# Altium PCB ADC_Sensor_Unit_board.PcbDoc
Units mm, origin at the board's own origin, x right, y up, seen from the top; angles counter-clockwise.
Board outline 60 x 60 mm, 4 copper layers (Component Side Top, Ground Plane, Power Plane, Component Side Bottom), stack 0.844 mm thick; 87 components, 63 nets, 347 pads, 119 vias.
Unrouted connection lines stored in the file: 6.
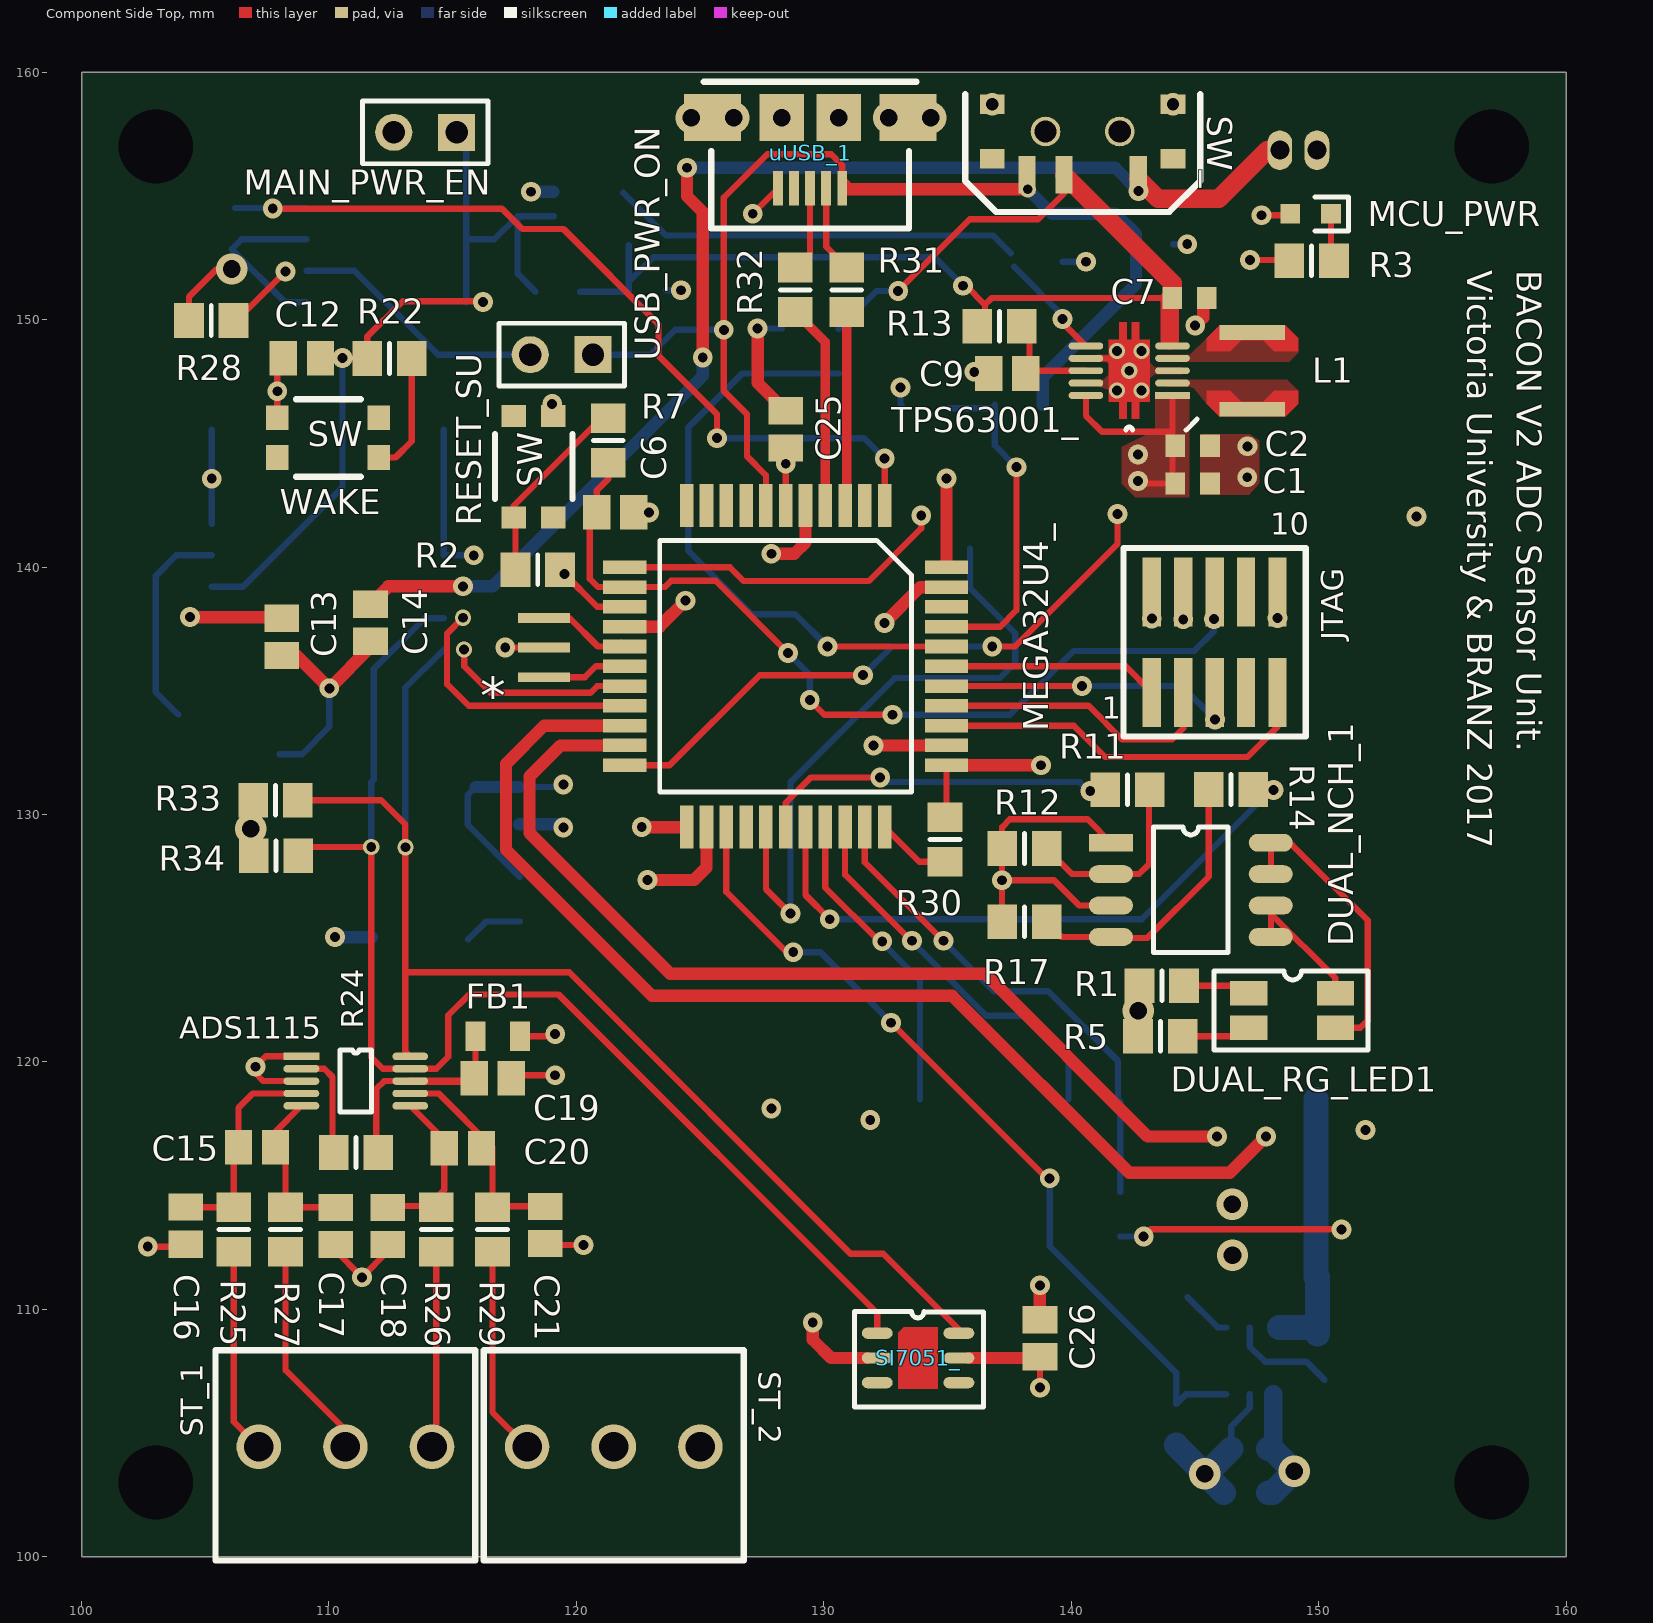
[diagram p0: Component Side Top view]
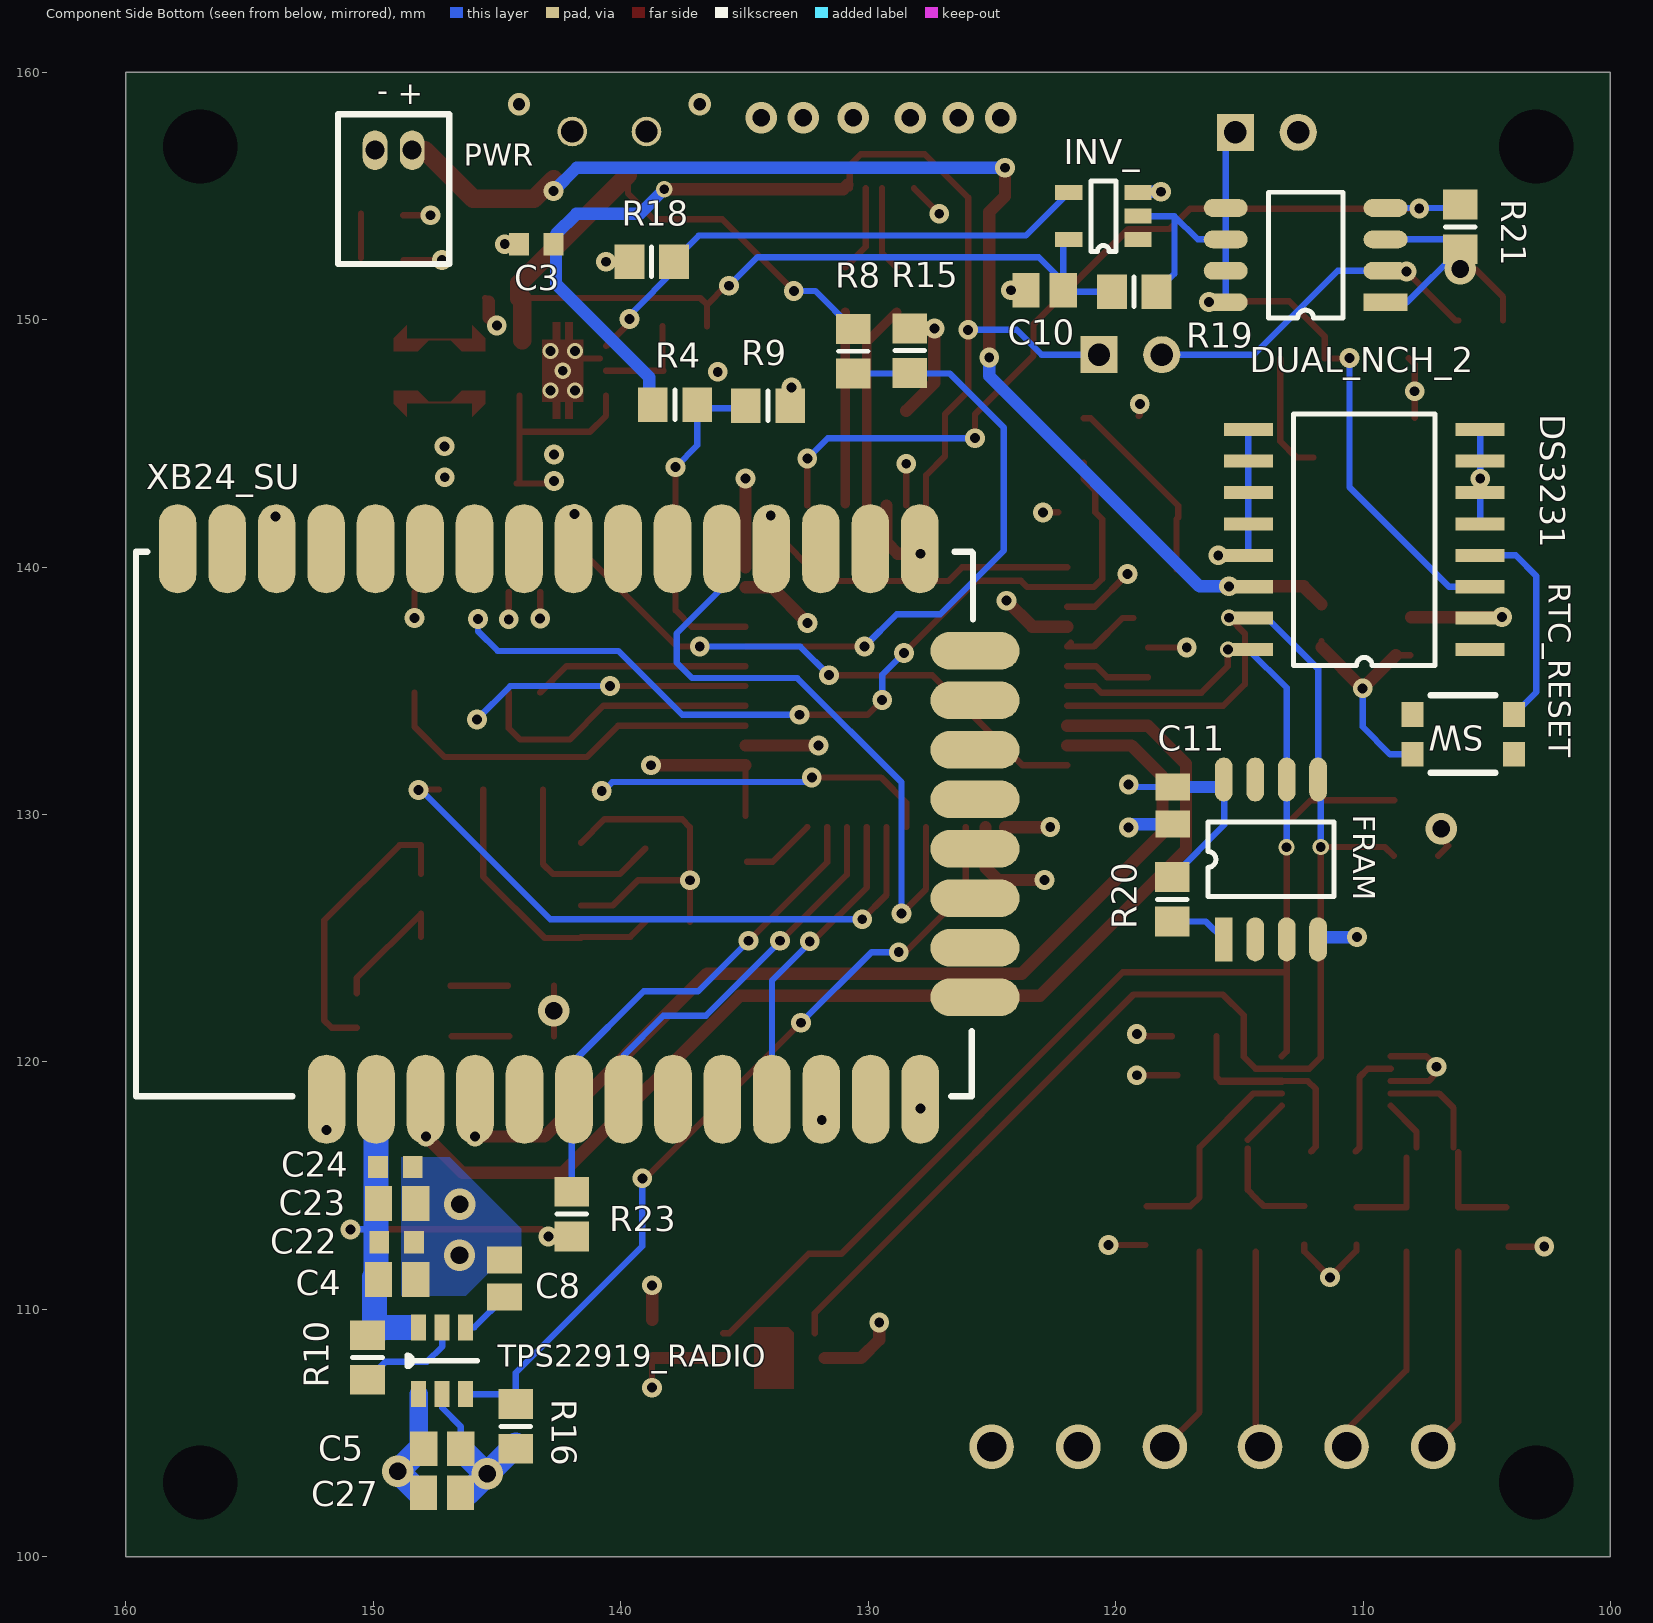
[diagram p1: Component Side Bottom view, seen from below]
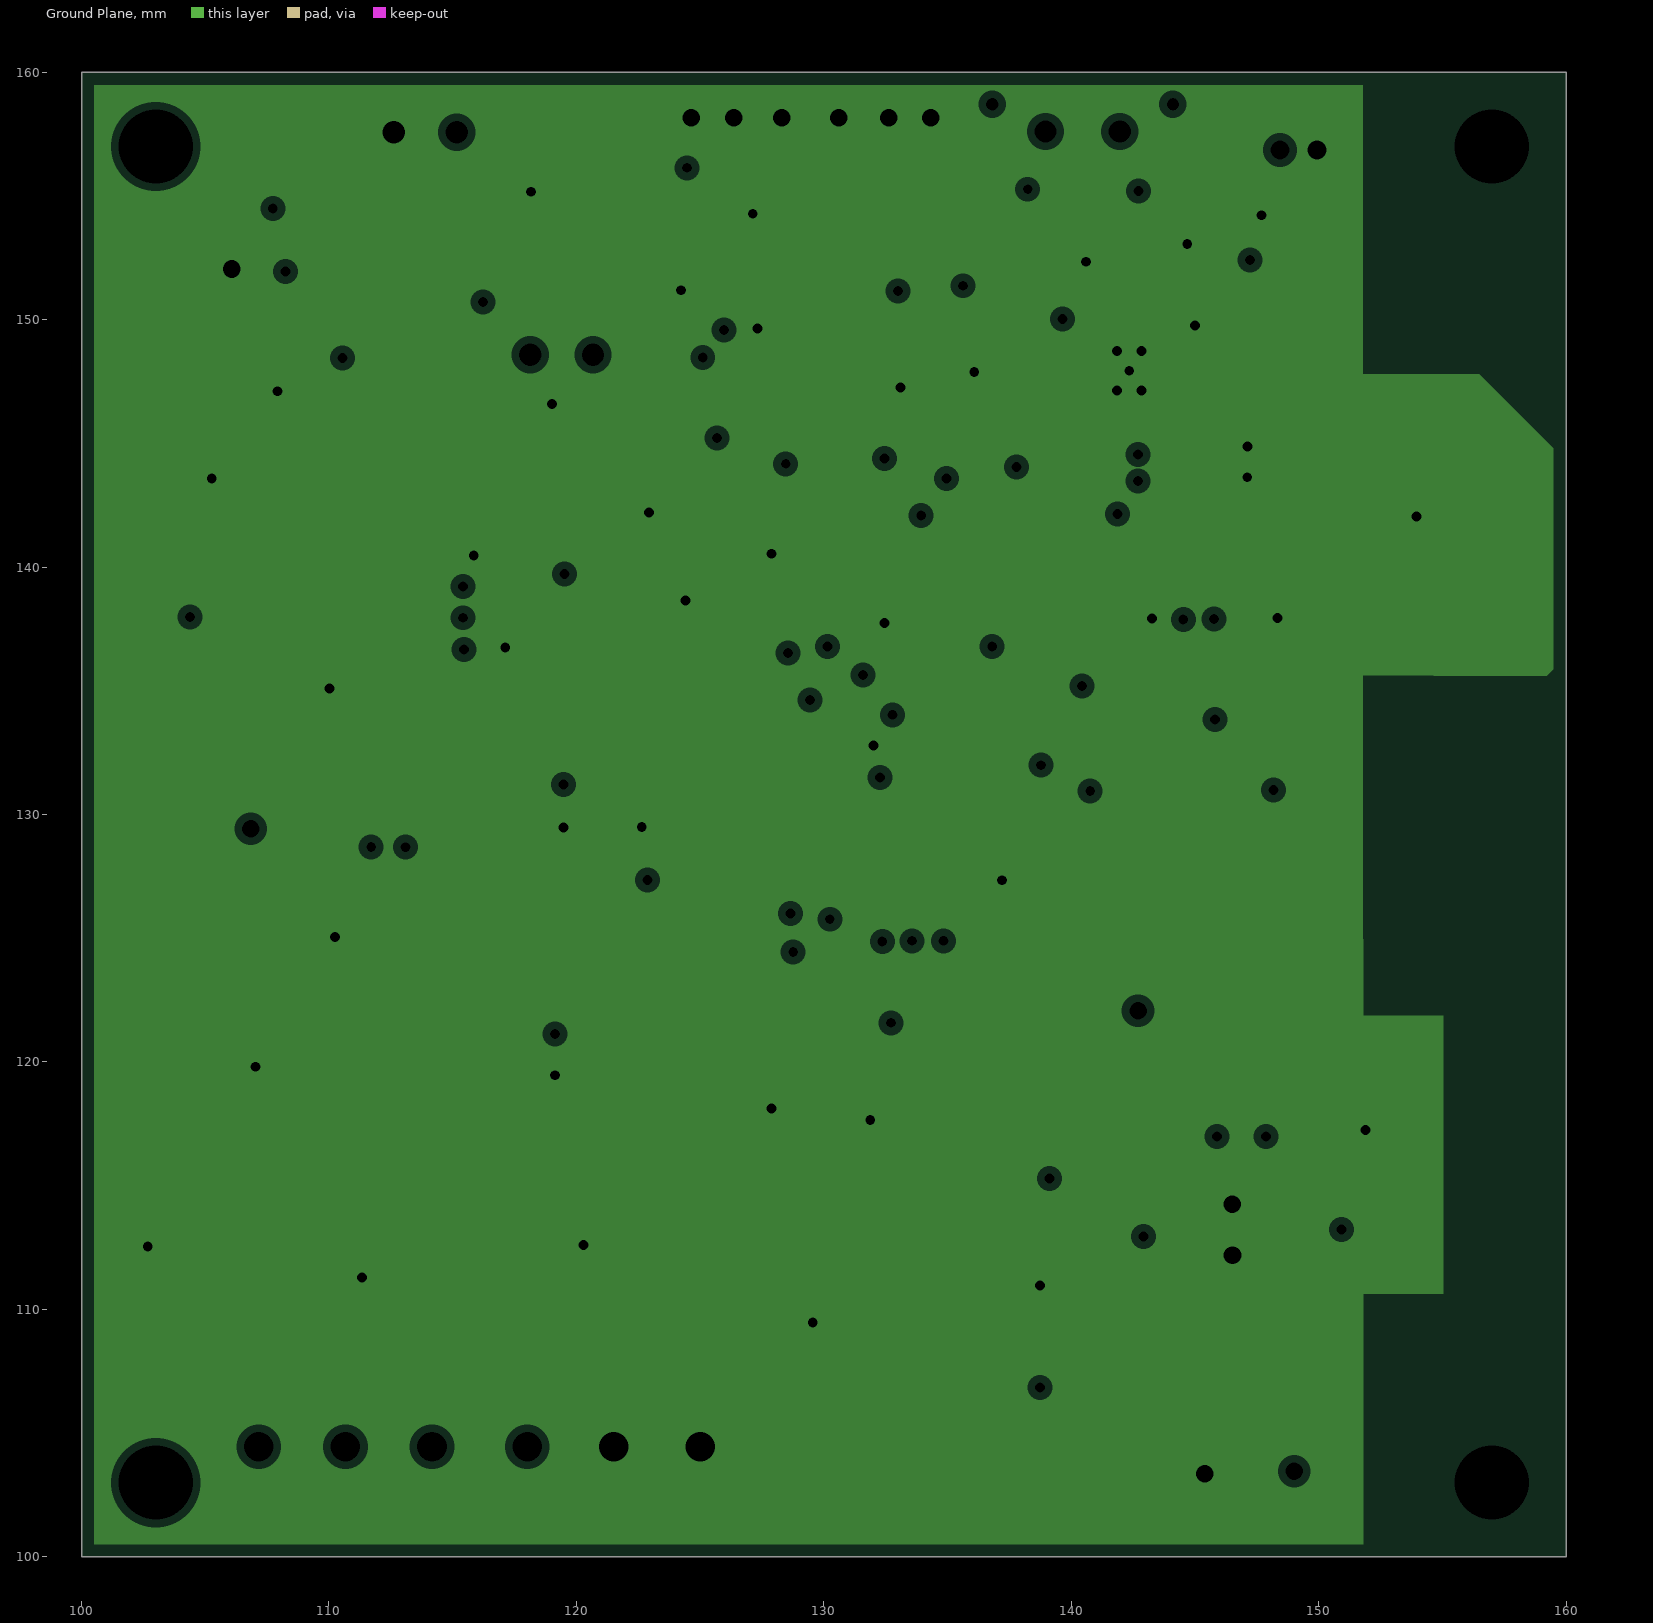
[diagram p2: Ground Plane, clearances drawn from the general rule]
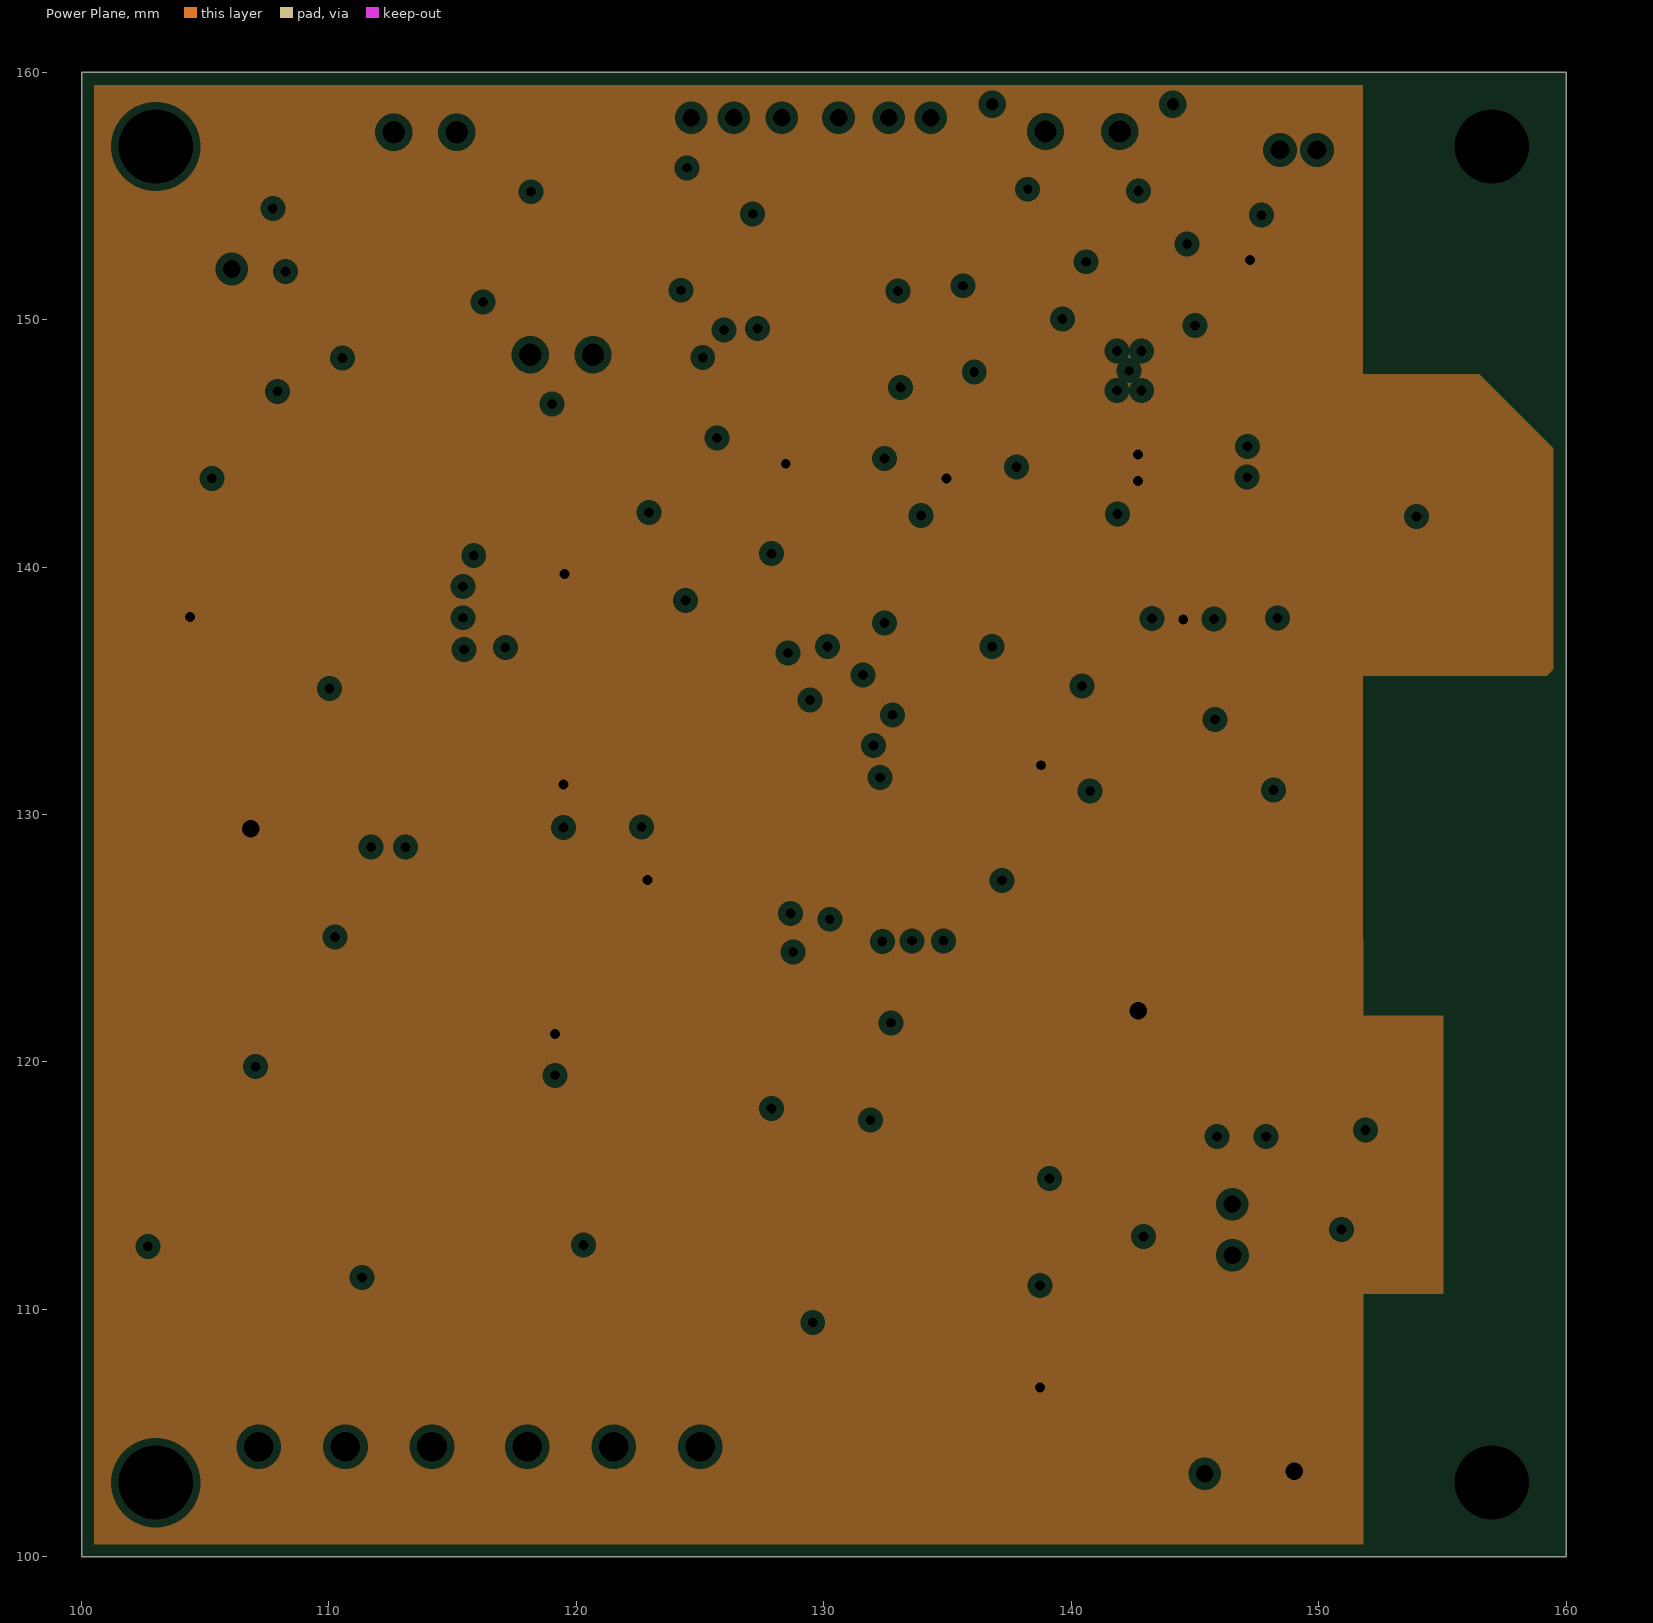
[diagram p3: Power Plane, clearances drawn from the general rule]

## Layer stack, top to bottom
Top Solder: solder mask 0.0102, Solder Resist, Dk 3.5
Component Side Top: signal copper 0.0356
Dielectric 1: core 0.32, FR-4, Dk 4.8
Ground Plane: plane copper 0.036, net GND
Dielectric 3: prepreg 0.127, Dk 4.2
Power Plane: plane copper 0.036, net +3V3
Dielectric 4: core 0.254, Dk 4.2
Component Side Bottom: signal copper 0.0356
Bottom Solder: solder mask 0.0102, Solder Resist, Dk 3.5

## Board outline
100,100 160,100 160,160 100,160

## Design rules (kind name [scope] priority, off if disabled: settings)
Clearance [All] p1: gap=0.152
DiffPairsRouting [All] p1: maxlimit=0.254 minlimit=0.254 mostfreqgap=0.254 toplayer_minwidth=0.381 toplayer_maxwidth=0.381 toplayer_prefwidth=0.381 bottomlayer_minwidth=0.381 bottomlayer_maxwidth=0.381 bottomlayer_prefwidth=0.381 maxuncoupledlength=12.7
HoleSize [All] p1: absolutevalues=TRUE maxlimit=6.3 minlimit=0.3 maxpercent=80.000 minpercent=20.000
PlaneClearance [All] p1: clearance=0.305
PlaneConnect [All] p1: planeconnectstyle=Direct reliefexpansion=0.508 reliefentries=4 reliefconductorwidth=0.254 reliefairgap=0.254
PolygonConnect PolygonConnect_5 [All vs IsNamedPolygon('RegGND')] p1: connectstyle=Direct reliefconductorwidth=0.254 reliefentries=4 polygonreliefangle="90 Angle" airgapwidth=0.254
PolygonConnect PolygonConnect_4 [All vs IsNamedPolygon('RegGND')] p2: connectstyle=Direct reliefconductorwidth=0.254 reliefentries=4 polygonreliefangle="90 Angle" airgapwidth=0.254
PolygonConnect PolygonConnect_3 [All vs IsNamedPolygon('GND')] p3: connectstyle=Direct reliefconductorwidth=0.254 reliefentries=4 polygonreliefangle="90 Angle" airgapwidth=0.254
PolygonConnect PolygonConnect_2 [All vs IsNamedPolygon('L1_pin_2')] p4: connectstyle=Direct reliefconductorwidth=0.254 reliefentries=4 polygonreliefangle="90 Angle" airgapwidth=0.254
PolygonConnect PolygonConnect_1 [All vs IsNamedPolygon('L1_pin')] p5: connectstyle=Direct reliefconductorwidth=0.254 reliefentries=4 polygonreliefangle="90 Angle" airgapwidth=0.254
PolygonConnect [All] p6: connectstyle=Direct reliefconductorwidth=0.254 reliefentries=4 polygonreliefangle="90 Angle" airgapwidth=0.254
RoutingVias [All] p1: holewidth=0.4 width=0.8 viastyle="Through Hole" minholewidth=0.3 minwidth=0.6 maxholewidth=6.3 maxwidth=2
SolderMaskExpansion [All] p1: expansion=0.102
Width [All] p1: maxlimit=10 minlimit=0.152 preferedwidth=0.254
26 further rules are at their usual default settings.

## Classes and differential pairs
differential pair D_SU2: +D_SU2_P -D_SU2_N

## Components (designator, comment, footprint, x,y, rotation, side; value= is the part's Value field where it differs from the comment)
* "Resonator_8MHz" Resonator_8MHz 118.695,135.549 r90 top (schematic designator *1)
ADS1115 "ADS1115" VSSOP10 108.887,120.228 r0 top (schematic designator ADC_)
C1 "Cap Semi" 1608[0603] 144.907,143.383 r0 top
C2 "Cap Semi" 1608[0603] 144.907,144.907 r0 top
C3 "Cap Semi" 1608[0603] 143.414,153.054 r180 bottom
C4 "Cap Semi" C0805 149.041,111.21 r180 bottom
C5 "Cap Semi" C0805 147.214,104.369 r180 bottom
C6 "Cap Semi" C0805 121.574,142.213 r180 top
C7 "Cap Semi" 1608[0603] 144.78,150.876 r180 top
C8 "Cap Semi" C0805 144.7,111.249 r90 bottom
C9 "Cap Semi" C0805 137.414,147.828 r0 top
C10 "Cap Semi" C0805 122.871,151.191 r180 bottom
C11 "Cap Semi" C0805 117.698,130.365 r90 bottom
C12 "Cap Semi" C0805 108.908,148.447 r180 top
C13 "Cap Semi" C0805 108.098,137.184 r90 top
C14 "Cap Semi" C0805 111.68,137.751 r90 top
C15 "Cap Semi" C0805 107.091,116.549 r180 top
C16 "Cap Semi" C0805 104.217,113.385 r270 top
C17 "Cap Semi" C0805 110.269,113.37 r270 top
C18 "Cap Semi" C0805 112.38,113.37 r270 top
C19 "Cap Semi" C0805 116.622,119.34 r0 top
C20 "Cap Semi" C0805 115.413,116.507 r180 top
C21 "Cap Semi" C0805 118.743,113.415 r270 top
C22 "Cap Semi" 1608[0603] 149.063,112.711 r180 bottom
C23 "Cap Semi" C0805 149.041,114.279 r180 bottom
C24 "Cap Semi" 1608[0603] 149.107,115.759 r180 bottom
C25 "Cap Semi" C0805 128.459,145.571 r270 top
C26 "Cap Semi" C0805 138.736,108.836 r270 top
C27 "Cap Semi" C0805 147.225,102.595 r180 bottom
DS3231 "DS3231" "16 SO" 105.265,136.667 r0 bottom
DUAL_NCH_1 "DUAL_MOSFET_IRF8915TRPBF" SOP-8 141.605,128.864 r0 top
DUAL_NCH_2 "DUAL_MOSFET_IRF8915TRPBF" SOP-8 109.092,150.707 r0 bottom
DUAL_RG_LED1 "LED_GREEN_RED_HSMF" LED4 147.176,122.78 r0 top
FB1 "Ferrite_Bead" FERRITE_BEAD 115.92,121.039 r0 top
FRAM "FRAM 8-SOP" SOP-8 115.628,124.957 r90 bottom
INV_ "Inverter" SOT-23 119.098,153.237 r0 bottom
JTAG "FTSH-105-01-XXX-DV-K" FTSH-105-01-XXX-DV-K 145.799,136.965 r0 top
L1 "Inductor" 2.2uH_Inductor 147.32,149.479 r270 top
MAIN_PWR_EN "Header 2" HDR1X2 115.161,157.574 r180 top
MCU_PWR "LED2" LED_Single_Orange 150.503,154.279 r180 top
MEGA32U4_ "ATMEGA32U4-AUR" Quad44 132.461,142.494 r270 top
PWR "ZH Conn" "ZH Series Header - 2 Position" 149.182,156.854 r0 bottom
R1 "Res3" 6-0805_N 143.662,123.076 r180 top
R2 "Res3" 6-0805_N 118.439,139.902 r0 top
R3 "Res3" 6-0805_N 149.718,152.377 r0 top
R4 "Res3" 6-0805_N 137.807,146.56 r0 bottom
R5 "Res3" 6-0805_N 143.603,121.038 r180 top
R7 "Res3" 6-0805_N 121.29,145.119 r90 top
R8 "Res3" 6-0805_N 130.6,148.725 r90 bottom
R9 "Res3" 6-0805_N 134.055,146.519 r0 bottom
R10 "Res3" 6-0805_N 150.238,108.053 r90 bottom
R11 "Res3" 6-0805_N 142.272,131.003 r180 top
R12 "Res3" 6-0805_N 138.107,128.629 r0 top
R13 "Res3" 6-0805_N 137.099,149.737 r180 top
R14 "Res3" 6-0805_N 146.456,131.015 r0 top
R15 "Res3" 6-0805_N 128.315,148.747 r270 bottom
R16 "Res3" 6-0805_N 144.241,105.275 r270 bottom
R17 "Res3" 6-0805_N 138.107,125.666 r0 top
R18 "Res3" 6-0805_N 138.751,152.343 r180 bottom
R19 "Res3" 6-0805_N 119.25,151.131 r180 bottom
R20 "Res3" 6-0805_N 117.717,126.576 r90 bottom
R21 "Res3" 6-0805_N 106.077,153.754 r90 bottom
R22 "Res3" 6-0805_N 112.45,148.435 r180 top
R23 "Res3" 6-0805_N 141.984,113.85 r90 bottom
R24 "Res3" 6-0805_N 111.091,116.345 r180 top
R25 "Res3" 6-0805_N 106.15,113.23 r90 top
R26 "Res3" 6-0805_N 114.334,113.23 r90 top
R27 "Res3" 6-0805_N 108.247,113.23 r90 top
R28 "Res3" 6-0805_N 105.244,149.971 r180 top
R29 "Res3" 6-0805_N 116.609,113.23 r90 top
R30 "Res3" 6-0805_N 134.901,128.992 r270 top
R31 "Res3" 6-0805_N 130.931,151.21 r270 top
R32 "Res3" 6-0805_N 128.85,151.21 r270 top
R33 "Res3" 6-0805_N 107.837,130.581 r0 top
R34 "Res3" 6-0805_N 107.862,128.336 r0 top
RESET_SU "SW-PB" SW_TACTILE 117.466,142.01 r90 top
RTC_RESET "SW-PB" SW_TACTILE 103.901,132.442 r0 bottom (schematic designator RTC_RESET_1)
SI7051_ "SI7051" "SI7051 - small" 132.26,109.039 r0 top
ST_1 "Screw_terminal" "Screw Terminal" 110.665,104.45 r0 top
ST_2 "Screw_terminal" "Screw Terminal" 121.511,104.45 r0 top
SW_ "Slide_switch" Slide_SW 140.462,157.607 r180 top
TPS22919_RADIO "TPS22918-Q1" SOT-23-6 148.171,106.573 r90 bottom
TPS63001_ "TPS63001DRCT" "SON10 - small" 144.145,146.939 r180 top locked
USB_PWR_ON "Header 2" HDR1X2 120.675,148.588 r180 top (schematic designator P1)
uUSB_1 "micro_USB" MicroUSB_CONN 129.447,155.316 r180 top
WAKE "SW-PB" SW_TACTILE 107.915,146.033 r0 top
XB24_SU "XB24CDMUIS-001" XB24_RADIO 151.892,118.618 r90 bottom locked

## Footprints (in the part's own frame and the unit in brackets; to place one, negate y for a bottom-side part, rotate by r counter-clockwise, add the part's x,y. Pads: shape width x height; smd on the part's side, far side on the other; paste and mask are expansions set on the pad)
2.2uH_Inductor [mm] "LPS3314-222MRB"
  rect 0.6x2.65 smd: 1(0,0) 2(3.1,0)
  Component Side Top region: 3.4,-1.325 2.875,-1.85 2.35,-1.85 2.35,-0.882 2.8,-0.44 2.8,0.44 2.35,0.882 2.35,1.85 2.875,1.85 3.4,1.325 2.85,1.325 2.85,-1.325
  Component Side Top region: -0.3,1.325 0.225,1.85 0.75,1.85 0.75,0.882 0.3,0.44 0.3,-0.44 0.75,-0.882 0.75,-1.85 0.225,-1.85 -0.3,-1.325 0.25,-1.325 0.25,1.325
  body extent -0.3,-1.85 3.4,1.85, height 1.4
6-0805_N [mm] "Chip Resistor, Body 2.0x1.2mm, IPC Medium Density"
  rect 1.2x1.4 smd: 1(-0.9,0) 2(0.9,0)
  silkscreen extent 0,-0.6 0,0.6, body extent -1.07,-0.7 1.07,0.7, height 0.7
"16 SO" [mm]
  rect 1.98x0.53 smd: 1(0,0) 2(0,-1.27) 3(0,-2.54) 4(0,-3.81) 5(0,-5.08) 6(0,-6.35) 7(0,-7.62) 8(0,-8.89) 9(9.37,-8.89) 10(9.37,-7.62) 11(9.37,-6.35) 12(9.37,-5.08) 13(9.37,-3.81) 14(9.37,-2.54) 15(9.37,-1.27) 16(9.37,0)
  silkscreen extent 1.83,-9.53 7.54,0.64, body extent 1.83,-9.53 7.54,0.64, height 3
1608[0603] [mm] "Chip Capacitor, Body 1.6x0.8mm, IPC High Density"
  rect 0.8x0.9 smd: 1(-0.7,0) 2(0.7,0)
  body extent -0.87,-0.48 0.87,0.48, height 1.3
C0805 [mm] "Chip Capacitor, Body 2.0x1.3mm, IPC High Density"
  rect 1.1x1.4 smd: 1(-0.75,0) 2(0.75,0)
  body extent -1.1,-0.72 1.1,0.72, height 1.4
FERRITE_BEAD [mm] "MMZ2012Y152B"
  rect 0.8x1.2 smd: 1(0,0) 2(1.8,0)
  body extent -0.02,-0.58 1.84,0.59, height 2
FTSH-105-01-XXX-DV-K [mil]
  rect 29x110 smd mask+2: 1(-100,-80) 2(-100,80) 3(-50,-80) 4(-50,80) 5(0,-80) 6(0,80) 7(50,-80) 8(50,80) 9(100,-80) 10(100,80)
  silkscreen extent -145,-150 145,150
HDR1X2 [mm] "Connector; Header; 2 Position"
  rect 1.5x1.5 hole 0.9: 1(0,0)
  round 1.5 hole 0.9: 2(2.54,0)
  silkscreen extent -1.27,-1.27 3.81,1.27
LED4 [mm]
  rect 1.5x1 smd: 1(0,0) 2(3.5,0) 3(0,-1.4) 4(3.5,-1.4)
  silkscreen extent -1.4,-2.29 4.83,0.89, body extent -0.03,-1.88 3.62,0.5, height 2
LED_Single_Orange [mm] "KP-1608SECK"
  rect 0.8x0.8 smd: 1(0,0) 2(1.65,0)
  silkscreen extent -0.71,-0.67 0.65,0.7, body extent -0.07,-0.5 1.77,0.46, height 2
MicroUSB_CONN [mm]
  rect 0.4x1.4 smd: 1(-1.3,0) 2(-0.65,0) 3(0,0) 4(0.65,0) 5(1.3,0)
  rect 2.3x1.9 smd: 5(-3.95,-2.85) 5(3.95,-2.85)
  rect 1.8x1.9 smd: 5(-1.15,-2.85) 5(1.15,-2.85)
  silkscreen extent -4.3,-4.3 4.3,1.63
Quad44 [mm]
  rect 1.75x0.55 smd: 1(0,0) 2(0,-0.8) 3(0,-1.6) 4(0,-2.4) 5(0,-3.2) 6(0,-4) 7(0,-4.8) 8(0,-5.6) 9(0,-6.4) 10(0,-7.2) 11(0,-8) 23(13,-8) 24(13,-7.2) 25(13,-6.4) 26(13,-5.6) 27(13,-4.8) 28(13,-4) 29(13,-3.2) 30(13,-2.4) 31(13,-1.6) 32(13,-0.8) 33(13,0)
  rect 0.55x1.75 smd: 12(2.5,-10.5) 13(3.3,-10.5) 14(4.1,-10.5) 15(4.9,-10.5) 16(5.7,-10.5) 17(6.5,-10.5) 18(7.3,-10.5) 19(8.1,-10.5) 20(8.9,-10.5) 21(9.7,-10.5) 22(10.5,-10.5) 34(10.5,2.5) 35(9.7,2.5) 36(8.9,2.5) 37(8.1,2.5) 38(7.3,2.5) 39(6.5,2.5) 40(5.7,2.5) 41(4.9,2.5) 42(4.1,2.5) 43(3.3,2.5) 44(2.5,2.5)
  silkscreen extent 1.41,-9.09 11.59,1.09, body extent 1.27,-9.27 11.68,1.27, height 1.2
Resonator_8MHz [mm] "CSTCE8M00G55Z-R0"
  rect 0.4x2.1 smd: 1(0,0) 2(1.2,0) 3(2.4,0)
  body extent -0.33,-0.95 2.84,0.94, height 1.2
"Screw Terminal" [mm]
  round 1.8 hole 1.2: 1(-3.5,0) 2(0,0) 3(3.5,0)
  silkscreen extent -5.25,-4.6 5.25,3.9, body extent -5.25,-4.6 5.25,3.9, height 10
"SI7051 - small" [mm]
  oval 1.25x0.45 smd: 1(-0.1,0) 2(-0.1,-1) 3(-0.1,-2) 4(3.2,-2) 5(3.2,-1) 6(3.2,0)
  Component Side Top region: 0.98,0.25 2.35,0.25 2.35,-2.25 0.75,-2.25 0.75,0.02
  silkscreen extent -1.02,-2.98 4.2,0.87, body extent -0.33,-2.7 3.44,0.67, height 1
Slide_SW [mm] "PCM12SMTR"
  rect 0.7x1.5 smd: 1(-2.25,1.75) 2(0.75,1.75) 3(2.25,1.75)
  rect 1x0.8 smd: 4(-3.65,-1.1) 4(-3.65,1.1) 4(3.65,-1.1) 4(3.65,1.1)
  round 1.2 hole 0.9: 5(-1.5,0) 5(1.5,0)
  silkscreen extent -4.75,-1.5 4.75,3.25, body extent -3.14,-1.65 3.11,1.58, height 3
"SON10 - small" [mm]
  rect 1.4x0.28 smd: 1(0.05,0)
  oval 1.4x0.28 smd: 2(0.05,-0.5) 3(0.05,-1) 4(0.05,-1.5) 5(0.05,-2) 6(3.55,-2) 7(3.55,-1.5) 8(3.55,-1) 9(3.55,-0.5) 10(3.55,0)
  Component Side Top region: 1.4,0.25 1.4,0.95 1.7,0.95 1.7,0.25 1.9,0.25 1.9,0.95 2.2,0.95 2.2,0.25 2.625,0.25 2.625,-2.25 2.2,-2.25 2.2,-2.95 1.9,-2.95 1.9,-2.25 1.7,-2.25 1.7,-2.95 1.4,-2.95 1.4,-2.25 0.975,-2.25 0.975,0.25
  silkscreen extent -0.94,0.96 1.92,1.4, body extent 0.01,-2.95 3.65,0.96, height 2
SOP-8 [mm]
  rect 1.78x0.72 smd: 1(0,0)
  oval 1.78x0.72 smd: 2(0,-1.27) 3(0,-2.54) 4(0,-3.81) 5(6.46,-3.81) 6(6.46,-2.54) 7(6.46,-1.27) 8(6.46,0)
  silkscreen extent 1.72,-4.44 4.74,0.64, body extent 1.72,-4.44 4.74,0.64, height 2
SOT-23 [mm]
  rect 1.1x0.6 smd: 1(0,0) 2(0,-0.95) 3(0,-1.9) 4(2.8,-1.9) 5(2.8,0)
  silkscreen extent 0.89,-2.38 1.91,0.48, body extent 0.72,-2.19 2.08,0.24, height 2
SOT-23-6 [mm]
  rect 1.05x0.6 smd: 1(0,0) 2(0,-0.95) 3(0,-1.9) 4(2.7,-1.9) 5(2.7,-0.95) 6(2.7,0)
  silkscreen extent 1.11,-2.38 1.59,0.48, body extent 0.65,-2.19 2.01,0.24, height 2
SW_TACTILE [mm] "KMR231G LFS"
  rect 0.9x1 smd: 1(0,0) 1(4.1,0) 2(0,-1.6) 2(4.1,-1.6)
  silkscreen extent 0.75,-2.37 3.37,0.75, body extent 0.27,-2.13 3.77,0.55, height 2
VSSOP10 [mm]
  rect 1.45x0.3 smd: 1(0,0)
  oval 1.45x0.3 smd: 2(0,-0.5) 3(0,-1) 4(0,-1.5) 5(0,-2) 6(4.4,-2) 7(4.4,-1.5) 8(4.4,-1) 9(4.4,-0.5) 10(4.4,0)
  silkscreen extent 1.56,-2.25 2.84,0.25, body extent 0.93,-2.26 3.48,0.23, height 2
XB24_RADIO [mm] "XB24CDMUIS-001"
  oval 3.6x1.52 smd: 1(-0.125,0) 2(-0.125,-2) 3(-0.125,-4) 4(-0.125,-6) 5(-0.125,-8) 6(-0.125,-10) 7(-0.125,-12) 8(-0.125,-14) 9(-0.125,-16) 10(-0.125,-18) 11(-0.125,-20) 12(-0.125,-22) 13(-0.125,-24) 22(22.125,-23.98) 23(22.125,-21.98) 24(22.125,-19.98) 25(22.125,-17.98) 26(22.125,-15.98) 27(22.125,-13.98) 28(22.125,-11.98) 29(22.125,-9.98) 30(22.125,-7.98) 31(22.125,-5.98) 32(22.125,-3.98) 33(22.125,-1.98) 34(22.125,0.02) 35(22.125,2.02) 36(22.125,4.02) 37(22.125,6.02)
  oval 1.52x3.6 smd: 14(4,-26.21) 15(6,-26.21) 16(8,-26.21) 17(10,-26.21) 18(12,-26.21) 19(14,-26.21) 20(16,-26.21) 21(18,-26.21)
  silkscreen extent 0,-26.12 22,7.7, body extent 0,-26.07 22,7.7, height 4
"ZH Series Header - 2 Position" [mm]
  oval 1x1.6 hole 0.762: 1(-0.75,0) 2(0.75,0)
  silkscreen extent -2.25,-1.45 2.25,4.6

## Part data
C1 C2 C3 C4 C5 C6 C7 C8 C9 C10 C11 C12 C13 C14 C15 C16 C17 C18 C19 C20 C21 C22 C23 C24 C25 C26 C27: "Capacitor (Semiconductor SIM Model)"
INV_: library part SN74LVC1GU04
JTAG: "TERMINAL STRIP, .050\"(1.27mm) PITCH, 10 PINS, KEYED"
MAIN_PWR_EN USB_PWR_ON: "Header, 2-Pin"
MCU_PWR: "Typical RED, GREEN, YELLOW, AMBER GaAs LED"
PWR: library part "Header 2", "Header, 2-Pin"
R1 R2 R3 R4 R5 R7 R8 R9 R10 R11 R12 R13 R14 R15 R16 R17 R18 R19 R20 R21 R22 R23 R24 R25 R26 R27 R28 R29 R30 R31 R32 R33 R34: "Resistor"
RESET_SU RTC_RESET WAKE: "Switch"

## Free pads (board coordinates)
  round 0 hole 3: 0(157,103) 1(157,157) 2(103,157) 3(103,103)

## Via types
v1: diameter 0.8, hole 0.4, Component Side Top to Component Side Bottom, 63 vias
v2: diameter 0.8, hole 0.4, Component Side Top to Component Side Bottom, tented bottom, 20 vias
v3: diameter 1.27, hole 0.711, Component Side Top to Component Side Bottom, 12 vias
v4: diameter 0.65, hole 0.4, Component Side Top to Component Side Bottom, tented top, 10 vias
v5: diameter 0.8, hole 0.4, Component Side Top to Component Side Bottom, tented both sides, 7 vias
v6: diameter 0.8, hole 0.4, Component Side Top to Component Side Bottom, tented top, 4 vias
v7: diameter 0.9, hole 0.5, Component Side Top to Component Side Bottom, 2 vias
v8: diameter 1.27, hole 0.711, Component Side Top to Component Side Bottom, tented bottom, 1 vias

## Nets (pads, with @x,y where several pads share a name; then routed paths per layer and width w, separated by ;. In a path a pad name is that pad's centre, name@x,y a point inside that pad or via, vN(x,y) a via of type N, cw(c..) or ccw(c..) an arc to the next point about the centre after c; other vN are vias at no path point)
+3V3: C1.1 C2.1 C5.1 C11.2 C13.2 C25.2 C26.2 C27.1 DS3231.2 FB1.2 FRAM.8 JTAG.4 MEGA32U4_.6 MEGA32U4_.14 MEGA32U4_.24 MEGA32U4_.34 MEGA32U4_.44 R1.2 R2.2 R3.1 R5.2 R20.2 R30.1 R33.1 R34.1 SI7051_.5 TPS22919_RADIO.1 TPS63001_.1 TPS63001_.10 | length 56.4
  Component Side Top w0.254: v3(106.835,129.431) 106.835,129.01 106.562,128.737 R34.1 ; C13.2@108.051,137.981 C13.2 ; FB1.2 v1@119.054,121.039 ; v1(119.143,121.128) 119.143,120.995 v1@119.211,120.927 ; R2.2 v1(119.52,139.722) 120.847,138.394 MEGA32U4_.14 ; MEGA32U4_.6 v1(128.461,144.178) ; R30.1@134.961,129.952 MEGA32U4_.34 ; v1(138.736,106.837) C26.2@138.736,107.992 ; TPS63001_.10 140.595,146.125 141.243,145.477 144.095,145.477 ; v1(142.695,143.487) 142.799,143.383 C1.1 ; v8@142.699,122.132 R1.2@142.699,123.076 ; R5.2 v8(142.703,122.073) ; C1.1@144.095,143.495 144.095,145.477 ; TPS63001_.1 144.095,145.477 ; v2(144.529,137.892) JTAG.4 ; v1(147.226,152.414) R3.1@148.781,152.414
  Component Side Top w0.5: v1(104.381,137.981) C13.2@108.051,137.981 ; v1(122.88,127.354) 124.759,127.354 125.261,127.856 MEGA32U4_.24 ; MEGA32U4_.34 v2(138.779,131.994) ; MEGA32U4_.44 v1(134.961,143.586) ; SI7051_.5@135.86,108.039 C26.2@138.689,108.039
  Component Side Bottom w0.254: FRAM.8@115.93,131.115 115.609,130.794 115.609,129.584 R20.2 ; C11.2 v1@119.375,131.115 ; v1@134.959,143.588 v1(134.961,143.586) ; v2(138.779,131.994) v2@138.796,132.011
  Component Side Bottom w0.5: FRAM.8@115.93,131.115 C11.2
  Component Side Bottom w0.75: C5.1@148.171,104.576 TPS22919_RADIO.1
  Component Side Bottom w1: C5.1 148.104,104.369 v3(149.013,103.46) 148.148,102.595 C27.1
  other v1: 119.474,131.214 142.695,144.553
+3V3_RADIO_SU: C4.1 C22.1 C23.1 C24.1 R10.2 R23.1 TPS22919_RADIO.6 XB24_SU.2 | length 21
  Component Side Top w0.254: v1(142.928,112.95) 143.214,113.236 v1(150.92,113.236)
  Component Side Bottom w0.254: R23.1 v1(142.928,112.95) ; 149.966,113.236 v1(150.92,113.236)
  Component Side Bottom w1: TPS22919_RADIO.6@148.404,109.273 R10.2@149.918,109.273 ; C4.1@149.892,111.311 XB24_SU.2 ; R10.2@149.954,108.994 C4.1@149.954,111.311
CTS_SU: MEGA32U4_.12 XB24_SU.25 | length 13.6
  Component Side Top w0.254: MEGA32U4_.12 126.207,139.994 126.764,139.437 131.811,139.437 133.938,141.564 v6(133.938,142.084)
D_SU2_N: MEGA32U4_.3 R31.2 | length 7.7
  Component Side Top w0.381: MEGA32U4_.3@130.931,142.564 R31.2
D_SU2_P: MEGA32U4_.4 R32.2 | length 8.3
  Component Side Top w0.381: R32.2 130.061,149.099 MEGA32U4_.4
D_SU_N: R31.1 uUSB_1.2 | length 3.6
  Component Side Top w0.254: uUSB_1.2 130.097,152.944 R31.1
D_SU_P: R32.1 uUSB_1.3 | length 3.5
  Component Side Top w0.254: R32.1 129.447,152.707 uUSB_1.3
DTR_SU: MEGA32U4_.30 XB24_SU.10 | length 12.9
  Component Side Top w0.254: MEGA32U4_.30 130.061,127.05 132.234,124.877 v2(132.365,124.877)
  Component Side Bottom w0.254: v2(132.365,124.877) 132.242,124.877 132.306,124.877 133.892,123.291 XB24_SU.10
GLED_EN_SU: MEGA32U4_.29 R14.2 | length 25
  Component Side Top w0.254: MEGA32U4_.29 129.261,126.75 v2(130.242,125.769) ; R14.2 v2@148.152,131.015
  Component Side Bottom w0.254: v2(130.242,125.769) 142.846,125.769 148.068,130.991 v2(148.176,130.991)
GND: *.2 ADS1115.1 ADS1115.3 C1.2 C2.2 C3.1 C4.2 C5.2 C6.1 C7.1 C8.2 C9.1 C10.1 C11.1 C12.2 C13.1 C14.1 C16.2 C17.2 C18.2 C19.2 C21.2 C22.2 C23.2 C24.2 C25.1 C26.1 C27.2 DS3231.5 DS3231.6 DS3231.7 DS3231.8 DS3231.9 DS3231.10 DS3231.11 DS3231.12 DS3231.13 DUAL_NCH_1.1 DUAL_NCH_1.3 DUAL_NCH_2.1 DUAL_NCH_2.3 FRAM.4 INV_.3 JTAG.2 JTAG.10 MAIN_PWR_EN.2 MCU_PWR.2 MEGA32U4_.5 MEGA32U4_.15 MEGA32U4_.23 MEGA32U4_.35 MEGA32U4_.43 PWR.2 R9.1 R12.1 R15.1 R16.2 R17.1 R18.1 R21.1 R28.2 RESET_SU.2 RTC_RESET.1 SI7051_.2 ST_2.2 ST_2.3 TPS22919_RADIO.2 TPS63001_.3 TPS63001_.7 TPS63001_.9 uUSB_1.5 WAKE.1 XB24_SU.1 XB24_SU.11 XB24_SU.13 XB24_SU.22 XB24_SU.35 | length 104.8
  Component Side Top w0.254: v1(102.678,112.538) C16.2@104.12,112.538 ; R28.2 104.344,150.921 105.474,152.051 v3(106.068,152.051) ; WAKE.1@107.915,146.033 v1(107.915,147.108) 107.915,148.204 C12.2 ; C13.1 C13.1@108.685,136.434 ; ADS1115.3 107.349,119.228 107.035,119.542 v1(107.035,119.81) 107.453,120.228 ADS1115.1 ; C17.2 110.269,112.364 v1(111.335,111.298) 112.38,112.343 C18.2 ; C14.1@111.68,136.765 C14.1 ; v1(117.128,136.749) *.2 ; C19.2@117.496,119.464 v1(119.143,119.464) ; C21.2@118.803,112.605 v1(120.294,112.605) ; v1(119.023,146.59) 119.023,146.153 RESET_SU.2@119.066,146.11 ; C6.1 v1(122.939,142.213) ; v1(127.128,154.281) 128.147,155.3 uUSB_1.5@128.147,155.316 ; R17.1 v2(137.207,127.344) ; TPS63001_.7@140.84,148.437 v4@141.913,148.437 ; DUAL_NCH_1.3 140.326,126.324 139.306,127.344 v2(137.207,127.344) ; DUAL_NCH_1.1 140.662,129.807 137.521,129.807 137.207,129.493 R12.1 v2(137.207,127.344) ; v2(143.259,137.925) JTAG.2 ; C7.1@145.333,150.729 C7.1 ; v1(147.687,154.223) MCU_PWR.2@148.797,154.223 ; v2(148.339,137.95) JTAG.10
  Component Side Top w0.5: C13.1@108.685,136.434 v1(110.017,135.102) C14.1@111.68,136.765 ; MEGA32U4_.15 123.366,137.594 v5(124.416,138.644) ; v1(122.642,129.494) MEGA32U4_.23 ; v1(127.327,149.647) 127.327,147.453 C25.1 ; v6(127.881,140.542) 128.805,140.542 129.261,140.998 MEGA32U4_.5 ; v1(129.554,109.469) 129.554,108.776 130.291,108.039 SI7051_.2@131.76,108.039 ; v5(132.008,132.794) MEGA32U4_.35 ; v5(132.455,137.748) 133.901,139.194 MEGA32U4_.43 ; C26.1 v1(138.736,110.973) ; v1(145.01,149.764) 145.333,150.087 C7.1@145.333,150.729
  Component Side Bottom w0.254: DS3231.5 DS3231.6 DS3231.7 DS3231.8 ; RTC_RESET.1@108.006,132.442 108.914,132.442 110.017,133.545 v1(110.017,135.102) ; DUAL_NCH_2.1 108.224,150.707 R21.1 106.47,153.247 DUAL_NCH_2.3 ; DS3231.9 DS3231.10 DS3231.11 DS3231.12 DS3231.13 v1(115.853,140.477) ; v1@117.108,136.769 v1(117.128,136.749) ; C10.1 v1(124.233,151.191) ; v1(127.327,149.647) R15.1 ; v5@131.965,132.751 v5(132.008,132.794) ; v1(133.098,147.257) 133.098,146.576 R9.1 ; R18.1 v1(140.6,152.343) ; C3.1 v1(144.688,153.054) ; R16.2 R16.2@144.241,104.516 ; v3(145.394,103.363) v3@145.707,103.363 ; C27.2@146.162,102.595 C27.2 ; C5.2 146.464,105.267 147.221,106.024 TPS22919_RADIO.2
  Component Side Bottom w0.5: v1(110.247,125.048) FRAM.4@111.727,125.048 ; C11.1 v1@119.341,129.615 ; v1(118.172,155.172) INV_.3@119.063,155.172
  Component Side Bottom w1: R16.2@144.241,104.516 v3(145.394,103.363) C27.2@146.162,102.595 ; v3@145.801,103.706 C5.2
  other v1: 151.899,117.249 131.88,117.654 127.881,118.118 119.474,129.482 153.956,142.049 105.266,143.576 147.114,143.635 147.129,144.884 136.081,147.894
  other v3: 146.518,112.189 146.503,114.256 124.643,158.166 126.355,158.166 128.297,158.166 130.597,158.166 132.628,158.166 134.325,158.166
  other v4: 141.845,147.139 142.845,147.139 142.345,147.939 141.845,148.739 142.845,148.739
MAIN_PWR_EN: INV_.4 R18.2 TPS63001_.6 | length 21.1
  Component Side Top w0.254: v6(139.645,150.024) 139.645,149.889 TPS63001_.6
  Component Side Bottom w0.254: INV_.4 123.634,153.401 136.844,153.401 R18.2@137.558,152.687 ; R18.2@137.695,152.135 139.645,150.185 v6(139.645,150.024)
MCU_PWR_EN: DUAL_NCH_2.4 MEGA32U4_.1 R21.2 | length 35
  Component Side Top w0.254: v1(107.73,154.49) 116.995,154.49 117.82,153.665 119.479,153.665 123.319,149.825 123.319,148.541 125.683,146.177 v1(125.683,145.212) ; MEGA32U4_.1 v1(132.461,144.386)
  Component Side Bottom w0.254: R21.2@106.214,154.517 DUAL_NCH_2.4 ; v1(125.683,145.212) 131.635,145.212 v1(132.461,144.386)
Net*1_1: *.1 MEGA32U4_.17 | length 3.5
  Component Side Top w0.254: *.1 120.347,135.549 120.792,135.994 MEGA32U4_.17
Net*1_3: *.3 MEGA32U4_.16 | length 3.4
  Component Side Top w0.254: *.3@119.289,137.949 119.719,137.949 120.874,136.794 MEGA32U4_.16 MEGA32U4_.16@121.814,136.941
NetADC__2: ADS1115.2 R24.2 | length 4.5
  Component Side Top w0.254: ADS1115.2 109.809,119.728 110.145,119.392 110.145,116.539 R24.2@110.302,116.382
NetADC__4: ADS1115.4 C15.2 C16.1 R25.2 | length 8.5
  Component Side Top w0.254: C16.1 R25.2@106.145,114.135 ; R25.2 C15.2@106.15,116.358 ; C15.2 106.341,118.14 106.929,118.728 ADS1115.4
NetADC__5: ADS1115.5 C15.1 C17.1 R27.2 | length 6.1
  Component Side Top w0.254: C15.1 107.841,117.182 ADS1115.5 ; C15.1@108.247,116.143 R27.2 C17.1@110.259,114.13
NetADC__6: ADS1115.6 C18.1 C20.2 R26.2 | length 6.2
  Component Side Top w0.254: C18.1@112.38,114.18 114.014,114.18 114.334,114.5 114.663,114.829 C20.2 ; ADS1115.6 C20.2@114.663,116.852
NetADC__7: ADS1115.7 C20.1 C21.1 R29.2 | length 8.5
  Component Side Top w0.254: ADS1115.7 114.441,118.728 116.609,116.56 116.609,114.539 116.983,114.165 C21.1
NetADC__8: ADS1115.8 C19.1 FB1.1 R24.1 | length 8.5
  Component Side Top w0.254: R24.1@112.102,116.382 111.915,116.569 111.915,118.913 112.23,119.228 ADS1115.8 ; C19.1@115.76,119.228 C19.1 115.92,119.388 FB1.1
  Component Side Top w0.3: ADS1115.8 C19.1@115.76,119.228
NetC8_1: C8.1 TPS22919_RADIO.4 | length 2.1
  Component Side Bottom w0.254: C8.1 145.926,109.273 TPS22919_RADIO.4
NetC9_2: C9.2 R13.1 TPS63001_.8 | length 4.1
  Component Side Top w0.254: R13.1@138.314,149.733 138.314,147.978 138.275,147.939 TPS63001_.8
NetDS3231_4: DS3231.4 RTC_RESET.2 | length 8.6
  Component Side Bottom w0.254: RTC_RESET.2@103.906,134.042 102.997,134.951 102.997,139.644 103.83,140.477 DS3231.4
NetDUAL_NCH_1_2: DUAL_NCH_1.2 R11.1 R12.2 | length 7.7
  Component Side Top w0.254: R12.2 140.042,127.594 DUAL_NCH_1.2 142.738,127.594 143.148,128.004 R11.1@143.148,131.003
NetDUAL_NCH_1_4: DUAL_NCH_1.4 R14.1 R17.2 | length 11.4
  Component Side Top w0.254: R17.2 139.619,125.054 DUAL_NCH_1.4 ; DUAL_NCH_1.4@141.612,125.014 143.085,125.014 145.564,127.493 R14.1@145.564,131.015
NetDUAL_NCH_1_5: DUAL_NCH_1.5 DUAL_NCH_1.6 DUAL_RG_LED1.2 | length 5.2
  Component Side Top w0.254: DUAL_NCH_1.5@148.072,125.054 148.072,125.997 150.671,123.398 ; DUAL_RG_LED1.2 150.676,123.398
NetDUAL_NCH_1_7: DUAL_NCH_1.7 DUAL_NCH_1.8 DUAL_RG_LED1.4 | length 11.8
  Component Side Top w0.254: DUAL_NCH_1.7@148.072,127.594 148.072,128.766 148.941,128.766 151.98,125.727 151.98,121.679 151.681,121.38 DUAL_RG_LED1.4
NetDUAL_NCH_2_2: DUAL_NCH_2.2 R28.1 USB_PWR_ON.2 | length 13.4
  Component Side Top w0.254: R28.1 106.267,149.971 v1(108.24,151.944)
  Component Side Bottom w0.254: DUAL_NCH_2.2 111.026,151.977 114.415,148.588 USB_PWR_ON.2
NetDUAL_RG_LED1_1: DUAL_RG_LED1.1 R1.1 | length 2.3
  Component Side Top w0.254: R1.1 DUAL_RG_LED1.1@146.88,123.076
NetDUAL_RG_LED1_3: DUAL_RG_LED1.3 R5.1 | length 2.3
  Component Side Top w0.254: R5.1 DUAL_RG_LED1.3@146.834,121.038
NetFRAM_1: FRAM.1 R20.1 | length 2.4
  Component Side Bottom w0.254: FRAM.1 116.347,125.676 R20.1
NetL1_1: L1.1 TPS63001_.4
NetL1_2: L1.2 TPS63001_.2
NetMCU_PWR_1: MCU_PWR.1 R3.2 | length 1.8
  Component Side Top w0.254: R3.2@150.503,152.492 MCU_PWR.1
NetMEGA32U4__33: MEGA32U4_.33 R30.2 | length 3
  Component Side Top w0.254: MEGA32U4_.33 133.863,128.092 R30.2
NetR2_1: R2.1 R7.2 RESET_SU.1 | length 7.8
  Component Side Top w0.254: RESET_SU.1@117.466,142.01 117.466,142.484 121.001,146.019 R7.2 ; R2.1 RESET_SU.1@117.539,141.937
NetR10_1: R10.1 TPS22919_RADIO.5 | length 4.3
  Component Side Bottom w0.254: TPS22919_RADIO.5 147.221,108.498 147.836,107.883 149.508,107.883 R10.1
NetR22_1: R22.1 WAKE.2 | length 5
  Component Side Top w0.254: WAKE.2@112.015,144.433 112.692,144.433 113.35,145.091 R22.1
NetR25_1: R25.1 ST_1.1 | length 8.3
  Component Side Top w0.254: R25.1 106.15,105.465 ST_1.1
NetR26_1: R26.1 ST_1.3 | length 8
  Component Side Top w0.254: ST_1.3 114.334,104.619 R26.1
NetR27_1: R27.1 ST_1.2 | length 8.9
  Component Side Top w0.254: R27.1 108.247,107.547 110.665,105.129 ST_1.2
NetR29_1: R29.1 ST_2.1 | length 8.5
  Component Side Top w0.254: R29.1 116.609,105.852 ST_2.1
R\E\S\E\T\_SU: C6.2 JTAG.6 MEGA32U4_.13 R7.1 | length 35.2
  Component Side Top w0.254: R7.1 121.29,143.564 120.824,143.098 C6.2 120.547,141.936 120.547,139.524 120.877,139.194 MEGA32U4_.13 123.57,139.194 123.827,139.451 125.631,139.451 v2(128.548,136.534) ; v2(129.435,134.625) 130.027,134.033 v2(132.783,134.033)
  Component Side Bottom w0.254: v2(128.548,136.534) 129.435,135.647 v2(129.435,134.625) ; v2(132.783,134.033) 137.516,134.033 140.098,136.615 144.978,136.615 145.771,137.408 v2(145.771,137.905)
RADIO_EN_SU: MEGA32U4_.25 R16.1 TPS22919_RADIO.3 | length 33.8
  Component Side Top w0.254: MEGA32U4_.25 126.061,126.873 128.496,124.438 v2(128.764,124.438) ; v2(132.72,121.585) v1@139.006,115.299
  Component Side Bottom w0.254: v2(128.764,124.438) 129.867,124.438 v2(132.72,121.585) ; v1(139.13,115.299) 139.13,112.549 144.241,107.438 R16.1 144.639,106.573 TPS22919_RADIO.3
RADIO_R\E\S\E\T\_SU: MEGA32U4_.32 R23.2 XB24_SU.6 | length 20.2
  Component Side Top w0.254: MEGA32U4_.32 131.661,128.071 v2(134.833,124.899)
  Component Side Bottom w0.254: v2(134.833,124.899) 136.877,122.855 139.077,122.855 141.892,120.04 XB24_SU.6 ; R23.2 XB24_SU.6@141.984,118.401
RLED_EN_SU: MEGA32U4_.28 R11.2 | length 14.7
  Component Side Top w0.254: MEGA32U4_.28 128.461,130.478 129.481,131.498 v5(132.279,131.498) ; v2(140.769,130.954) 140.769,130.673 R11.2@141.087,130.991
  Component Side Bottom w0.254: v5(132.279,131.498) 132.462,131.315 140.344,131.315 140.704,130.954 v2(140.769,130.954)
RTS_SU: MEGA32U4_.22 XB24_SU.29 | length 24.8
  Component Side Top w0.254: MEGA32U4_.22 123.766,131.994 127.407,135.635 v5(131.584,135.635) ; v5(136.808,136.791) 137.723,136.791 141.874,140.942 v1(141.874,142.146)
  Component Side Bottom w0.254: v5(131.584,135.635) 132.74,136.791 v5(136.808,136.791)
RX_STRENGTH_SU: MEGA32U4_.31 XB24_SU.7 | length 15.8
  Component Side Top w0.254: MEGA32U4_.31 130.861,127.565 133.527,124.899 v2(133.562,124.899)
  Component Side Bottom w0.254: v2(133.562,124.899) 133.527,124.899 136.559,121.867 138.28,121.867 139.892,120.255 XB24_SU.7
RXD_SU: MEGA32U4_.20 XB24_SU.3 | length 45.6
  Component Side Top w0.5: MEGA32U4_.20 118.701,133.594 117.156,132.049 117.156,128.578 123.056,122.678 135.187,122.678 142.337,115.528 146.415,115.528 v1(147.876,116.989)
SCL_SENS_BRD: ADS1115.10 DS3231.16 FRAM.6 MEGA32U4_.18 R33.2 SI7051_.6 | length 59.4
  Component Side Top w0.254: R33.2 112.108,130.581 113.088,129.601 v4(113.088,128.68) 113.088,123.624 ; ADS1115.10 113.088,120.427 113.088,123.624 ; v4(115.465,136.671) 115.465,135.994 116.532,134.927 120.574,134.927 120.841,135.194 MEGA32U4_.18 ; SI7051_.6@135.86,109.039 135.621,109.039 132.407,112.253 131.08,112.253 119.709,123.624 113.088,123.624
  Component Side Bottom w0.254: v4(113.088,128.68) FRAM.6 113.088,135.12 DS3231.16
SDA_SENS_BRD: ADS1115.9 DS3231.15 FRAM.5 MEGA32U4_.19 R34.2 SI7051_.1 | length 62
  Component Side Top w0.254: R34.2 109.113,128.687 v4(111.709,128.687) 111.709,120.19 112.171,119.728 ADS1115.9 114.344,119.728 114.824,120.208 114.824,121.885 115.668,122.729 119.28,122.729 132.16,109.849 SI7051_.1 ; v4(115.411,137.955) 114.775,137.319 114.775,135.265 115.646,134.394 MEGA32U4_.19
  Component Side Bottom w0.254: v4(111.709,128.687) 111.709,131.308 FRAM.5@111.813,131.412 ; FRAM.5 FRAM.5@111.813,131.412 ; DS3231.15 113.865,137.937 111.813,135.885 FRAM.5@111.813,131.412
SLEEP_STATUS_SU: MEGA32U4_.27 XB24_SU.26 | length 25.7
  Component Side Top w0.254: MEGA32U4_.27 127.661,126.993 v2(128.655,125.999)
  Component Side Bottom w0.254: v2(128.655,125.999) 128.655,131.306 132.866,135.517 137.112,135.517 137.739,136.144 137.739,137.322 135.912,139.149 XB24_SU.26
TCK: JTAG.1 MEGA32U4_.39 | length 8.7
  Component Side Top w0.254: MEGA32U4_.39 142.198,135.994 JTAG.1
TDI: JTAG.9 MEGA32U4_.36 | length 15.8
  Component Side Top w0.254: MEGA32U4_.36 140.109,133.594 141.38,132.323 147.113,132.323 148.339,133.549 JTAG.9
TDO: JTAG.3 MEGA32U4_.37 | length 11.8
  Component Side Top w0.254: MEGA32U4_.37 140.703,134.394 142.065,133.032 144.069,133.032 144.529,133.492 JTAG.3
TMS: JTAG.5 MEGA32U4_.38 | length 11.4
  Component Side Top w0.254: MEGA32U4_.38 v2(140.437,135.194)
  Component Side Bottom w0.254: v2(140.437,135.194) 144.462,135.194 v2(145.811,133.845)
TXD_SU: MEGA32U4_.21 XB24_SU.4 | length 39.5
  Component Side Top w0.5: MEGA32U4_.21 119.364,132.794 118.108,131.538 118.108,129.253 123.79,123.571 136.508,123.571 143.09,116.989 v1(145.889,116.989)
VBAT_LEVEL_SU: MEGA32U4_.40 R8.1 R15.2 | length 26.3
  Component Side Top w0.254: v5(130.15,136.794) MEGA32U4_.40
  Component Side Bottom w0.254: R15.2@128.337,147.825 R8.1 126.698,147.825 124.517,145.644 124.517,140.669 127.09,138.096 128.848,138.096 v5(130.15,136.794)
VBAT_SU: C14.2 DS3231.14 PWR.1 SW_.1 | length 51.6
  Component Side Top w0.254: SW_.1@142.712,155.685 SW_.1
  Component Side Top w0.5: C14.2 112.404,139.225 v1(115.424,139.225) ; v6(124.472,156.141) 124.472,154.992 125.108,154.356 v1(125.108,148.477) ; 147.926,156.854 PWR.1
  Component Side Top w0.75: SW_.1@142.712,155.685 143.511,154.886 145.958,154.886 147.926,156.854
  Component Side Bottom w0.5: v1(115.424,139.225) 116.607,139.225 125.108,147.726 v1(125.108,148.477) ; v6(124.472,156.141) 141.779,156.141 v1(142.717,155.203)
VBUS_DETECT: MEGA32U4_.41 R4.1 R9.2 | length 13.6
  Component Side Top w0.254: MEGA32U4_.41 137.13,137.594 137.787,138.251 v1(137.787,144.041)
  Component Side Bottom w0.254: R9.2@135.064,146.418 R4.1@136.907,146.418 ; R4.1 R4.1@136.907,146.418 ; v1(137.787,144.041) 136.907,144.921 R4.1@136.907,146.418
VBUS_SU: C3.2 MEGA32U4_.7 R4.2 SW_.3 USB_PWR_ON.1 uUSB_1.1 | length 46.5
  Component Side Top w0.254: MEGA32U4_.7 127.661,143.717 126.897,144.481 126.897,146.183 125.959,147.121 125.959,154.936 127.713,156.69 130.299,156.69 130.747,156.242 uUSB_1.1
  Component Side Top w0.5: uUSB_1.1@130.835,155.448 131.01,155.273 v4(138.242,155.273)
  Component Side Bottom w0.254: USB_PWR_ON.1 122.994,148.588 123.997,149.591 v1(125.96,149.591)
  Component Side Bottom w0.5: v4(138.242,155.273) 139.235,154.28 141.798,154.28 142.621,153.457 142.621,151.45 138.853,147.682 R4.2@138.853,146.56
VIN: C7.2 C10.2 INV_.5 R8.2 R13.2 R19.1 SW_.2 TPS63001_.5 | length 48.4
  Component Side Top w0.254: v1(133.007,151.164) 135.899,154.055 138.66,154.055 139.712,155.107 SW_.2 ; v1@135.752,151.373 136.514,150.611 ; R13.2@136.514,149.733 136.514,150.611 ; C7.2@143.991,150.876 136.779,150.876 136.514,150.611
  Component Side Top w0.75: SW_.2 144.095,151.474 C7.2@144.095,150.876 ; 143.991,149.178 C7.2@143.991,150.876
  Component Side Bottom w0.254: R19.1 122.061,151.131 C10.2 C10.2@122.121,151.54 ; INV_.5@122.121,153.014 C10.2@122.121,151.54 ; R8.2 132.139,151.164 v1(133.007,151.164) ; v1(135.63,151.373) 134.478,152.525 123.106,152.525 C10.2@122.121,151.54
WAKE_ALARM_SU: C12.1 DS3231.3 DUAL_NCH_2.5 DUAL_NCH_2.6 DUAL_NCH_2.7 DUAL_NCH_2.8 INV_.2 MAIN_PWR_EN.1 R19.2 R22.2 | length 33.7
  Component Side Top w0.254: v1@110.548,148.435 R22.2 111.55,149.323 112.979,150.752 116.225,150.752 v1(116.225,150.721)
  Component Side Bottom w0.254: DS3231.3 106.526,139.207 110.548,143.229 v1(110.548,148.456) ; MAIN_PWR_EN.1 115.552,157.183 DUAL_NCH_2.5 DUAL_NCH_2.6 ; DUAL_NCH_2.8 DUAL_NCH_2.7 DUAL_NCH_2.6 ; R19.2 117.624,151.857 117.624,154.187 ; INV_.2 117.624,154.187 ; DUAL_NCH_2.6 116.684,153.247 117.624,154.187
pads on no net: DS3231.1 FRAM.2 FRAM.3 FRAM.7 INV_.1 JTAG.7 JTAG.8 MEGA32U4_.2 MEGA32U4_.8 MEGA32U4_.9 MEGA32U4_.10 MEGA32U4_.11 MEGA32U4_.26 MEGA32U4_.42 SI7051_.3 SI7051_.4 SW_.4 SW_.5 uUSB_1.4 XB24_SU.5 XB24_SU.8 XB24_SU.9 XB24_SU.12 XB24_SU.14 XB24_SU.15 XB24_SU.16 XB24_SU.17 XB24_SU.18 XB24_SU.19 XB24_SU.20 XB24_SU.21 XB24_SU.23 XB24_SU.24 XB24_SU.27 XB24_SU.28 XB24_SU.30 XB24_SU.31 XB24_SU.32 XB24_SU.33 XB24_SU.34 XB24_SU.36 XB24_SU.37
copper on no net:
  other v7: 136.812,158.707 144.112,158.707

## Polygon pours and split planes (outlines as drawn)
GND on Component Side Top "RegGND" (solid, remove dead copper, pour order 6): 141.03,148.579 141.685,148.579 141.685,149.032 143.101,149.032 143.101,148.355 143.379,148.077 144.473,148.077 144.473,147.812 144.463,147.802 143.389,147.799 143.356,147.799 143.101,147.544 143.101,146.732 141.624,146.743 141.624,147.125 141.127,147.301 141.127,147.414 141.127,147.576 141.296,147.576 141.571,147.836 141.571,148.139 141.506,148.204 141.409,148.301 141.03,148.301
GND on Component Side Top "GND" (solid, remove dead copper, pour order 4): 145.217,145.33 145.268,145.381 147.209,145.381 147.607,145.129 147.607,143.395 147.192,142.934 145.217,142.934
NetL1_1 on Component Side Top "L1_pin" (solid, remove dead copper, pour order 0): 143.559,148.576 144.792,148.576 145.47,149.254 145.995,149.779 148.645,149.779 149.17,149.254 149.17,148.729 149.17,148.662 148.806,148.298 143.559,148.298
NetL1_2 on Component Side Top "L1_pin_2" (solid, remove dead copper, pour order 2): 143.825,147.57 148.729,147.57 149.17,147.129 149.17,146.604 148.645,146.079 145.995,146.079 145.47,146.604 144.946,147.233 144.783,147.291 143.922,147.291 143.781,147.291 143.739,147.333
+3V3 on Component Side Top "+3v3Reg" (solid, remove dead copper, pour order 8): 143.396,147.031 143.396,146.036 143.396,145.527 142.045,144.858 142.045,143.426 142.045,143.365 142.553,142.857 142.593,142.817 144.767,142.817 144.767,145.527 144.685,145.609 144.767,145.691 144.767,147.051
GND on Component Side Bottom "RadioGND" (solid, remove dead copper, pour order 10): 144.021,112.457 144.021,113.26 146.459,115.698 146.92,116.159 148.867,116.159 148.867,110.569 148.852,110.554 146.593,110.554 146.266,110.554 145.359,111.461
GND on Ground Plane (split plane): 151.796,147.81 156.496,147.81 159.49,144.816 159.49,135.864 159.226,135.6 154.636,135.6 154.636,135.62 151.796,135.62 151.796,128.05 151.816,121.88 155.056,121.88 155.056,110.62 151.826,110.62 151.826,100.51 100.51,100.51 100.51,159.49 151.796,159.49
+3V3 on Power Plane (split plane): 151.795,147.81 156.495,147.81 159.49,144.815 159.49,135.865 159.225,135.6 154.635,135.6 151.795,135.6 151.795,128.05 151.815,121.88 155.055,121.88 155.055,110.62 151.825,110.62 151.825,100.51 100.51,100.51 100.51,159.49 151.795,159.49

## Other copper
Ground Plane (plane layer: these items are gaps in the copper):
  pour cut-out: 151.826,99.653 151.826,110.62 155.056,110.62 155.056,121.88 151.816,121.88 151.796,128.05 151.796,135.62 154.636,135.62 154.636,135.6 159.226,135.6 160.026,136.4 160.026,144.28 156.496,147.81 151.796,147.81 151.796,160.517 161.796,160.517 161.796,99.653
Power Plane (plane layer: these items are gaps in the copper):
  pour cut-out: 151.825,99.653 151.825,110.62 155.055,110.62 155.055,121.88 151.815,121.88 151.795,128.05 151.795,135.6 154.635,135.6 159.225,135.6 160.025,136.4 160.025,144.28 156.495,147.81 151.795,147.81 151.795,160.517 161.795,160.517 161.795,99.653

## Silkscreen, mask and mechanical layers (free items; w line width, h text height)
Top Overlay:
  text "Victoria University & BRANZ 2017" at 156,152 h1 r270
  text "BACON V2 ADC Sensor Unit." at 158,152 h1 r270
  text "10" at 148.035,141.305 h0.9
  text "1" at 141.235,133.877 h0.9

## Text inside footprints (layer, text, board x,y; h text height)
JTAG: Mechanical 1 "J1" at 145.364,136.521 h0.64
PWR: Bottom Overlay "+ -" at 147.987,159.496 h0.9 r180
RESET_SU: Top Overlay "SW" at 118.616,143.235 h1 r90
RTC_RESET: Bottom Overlay "SW" at 105.126,133.592 h1 r180
WAKE: Top Overlay "SW" at 109.14,144.883 h1